# Altium PCB Rx_555_PCB.PcbDoc
Units mil, origin at the board's own origin, x right, y up, seen from the top; angles counter-clockwise.
Board outline 2952.76 x 1968.5 mil, 2 copper layers (Top Layer, Bottom Layer); 74 components, 29 nets, 163 pads, 0 vias.
Unrouted connection lines stored in the file: 133.
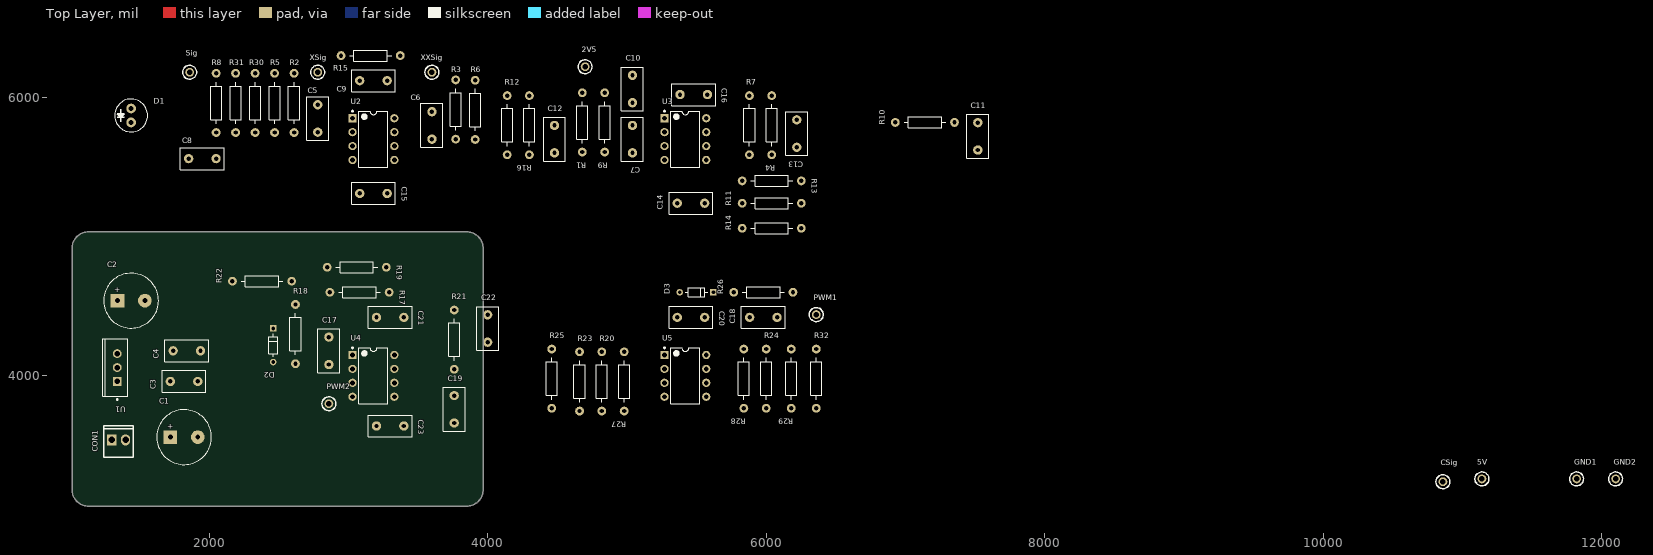
[diagram p0: Top Layer view]
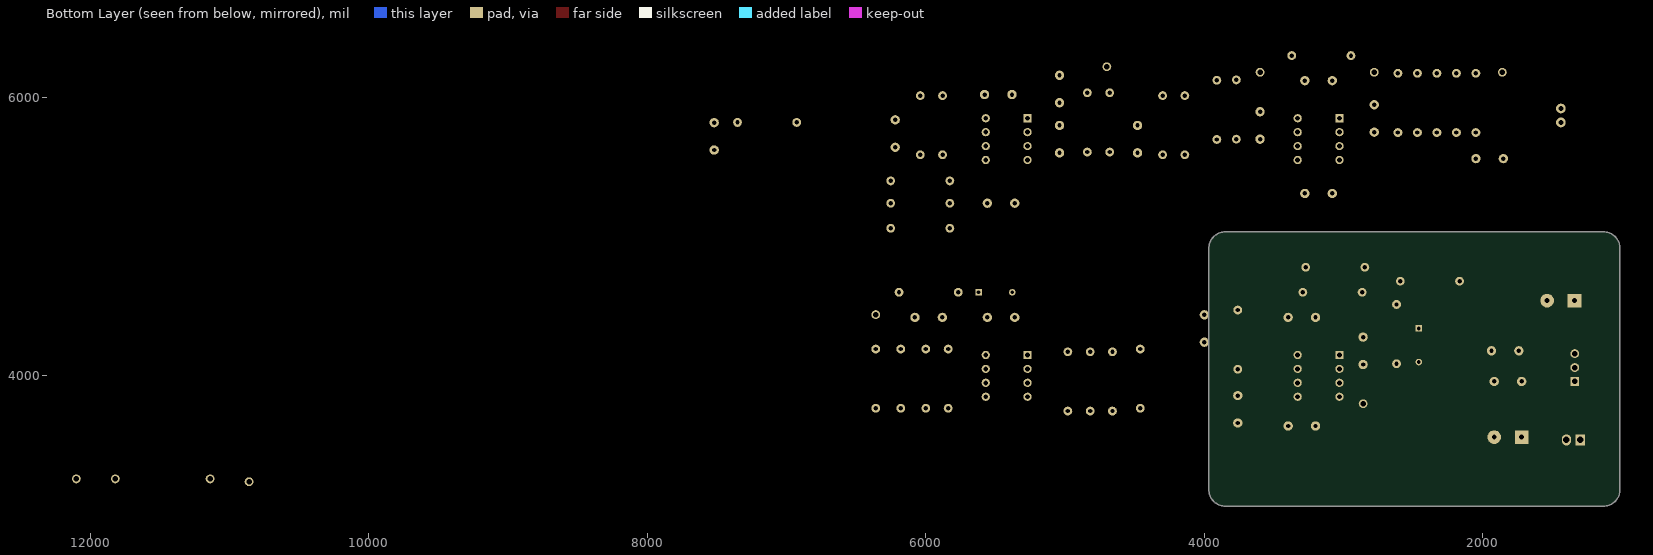
[diagram p1: Bottom Layer view, seen from below]

## Layer stack, top to bottom
Top Solder: solder mask 0.4, Solder Resist, Dk 3.5
Top Layer: signal copper 1.4
Dielectric 1: dielectric 12.6, FR-4, Dk 4.8
Bottom Layer: signal copper 1.4
Bottom Solder: solder mask 0.4, Solder Resist, Dk 3.5

## Board outline
1015.35,3183.11 1015.35,4915.39 cw(c1133.46,4915.39) 1133.46,5033.5 3850,5033.5 cw(c3850,4915.39) 3968.11,4915.39 3968.11,3183.11 cw(c3850,3183.11) 3850,3065 1133.46,3065 cw(c1133.46,3183.11)

## Design rules (kind name [scope] priority, off if disabled: settings)
BoardOutlineClearance [All] p1: gap=11.81 ignorepadtopadclearanceinfootprint=FALSE except(15.75: Arc-SplitBarrior Arc-SplitContinuation Track-SplitBarrior Track-SplitContinuation SMDPad-SplitBarrior SMDPad-SplitContinuation THPad-SplitBarrior THPad-SplitContinuation Via-SplitBarrior Via-SplitContinuation Fill-SplitBarrior Fill-SplitContinuation Poly-SplitBarrior Poly-SplitContinuation Region-SplitBarrior Region-SplitContinuation Text-SplitBarrior Text-SplitContinuation)
Clearance [All] p1: gap=10 ignorepadtopadclearanceinfootprint=TRUE
Height [All] p1: minheight=0 maxheight=1968.5 prefheight=500
HoleSize [All] p1: absolutevalues=TRUE maxlimit=472.44 minlimit=9.84 maxpercent=80.000 minpercent=20.000
MinimumAnnularRing [All] p1: minimumring=5.12
MinimumSolderMaskSliver [All] p1: minsoldermaskwidth=3.94
PolygonConnect PolygonConnect_1 [All] p1: thpad.connectstyle=Relief thpad.reliefconductorwidth=20 thpad.reliefentries=4 thpad.polygonreliefangle="90 Angle" thpad.airgapwidth=10 smdpad.connectstyle=Relief smdpad.reliefconductorwidth=20 smdpad.reliefentries=4 smdpad.polygonreliefangle="90 Angle" smdpad.airgapwidth=10 via.connectstyle=Direct via.reliefconductorwidth=20 via.reliefentries=4 via.polygonreliefangle="90 Angle" via.airgapwidth=10
RoutingCorners [All] p1: cornerstyle=Round minsetback=100 maxsetback=100
RoutingVias [All] p1: holewidth=15.75 width=25.59 viastyle="Through Hole" minholewidth=9.84 minwidth=15.75 maxholewidth=39.37 maxwidth=78.74
SilkToSilkClearance [All] p1: silktosilkclearance=3.94
SilkToSolderMaskClearance [IsPad] p1: minsilkscreentomaskgap=3.94 clearancetoexposedcopper=TRUE
SolderMaskExpansion [All] p1: expansion=4 istentingtop=FALSE
SupplyNets "Schematic Supply Nets" [InNet('Vof')] p1: voltage=0.000
SupplyNets "Schematic Supply Nets_20" [InNet('XXSig')] p2: voltage=0.000
SupplyNets "Schematic Supply Nets_19" [InNet('2V5')] p3: voltage=0.000
SupplyNets "Schematic Supply Nets_18" [InNet('PWM_555')] p4: voltage=0.000
SupplyNets "Schematic Supply Nets_17" [InNet('Sig')] p5: voltage=0.000
SupplyNets "Schematic Supply Nets_16" [InNet('XSig')] p6: voltage=0.000
SupplyNets "Schematic Supply Nets_15" [InNet('CSig')] p7: voltage=0.000
SupplyNets "Schematic Supply Nets_14" [InNet('PWM_Op')] p8: voltage=0.000
SupplyNets "Schematic Supply Nets_13" [InNet('Vfilt')] p9: voltage=0.000
SupplyNets "Schematic Supply Nets_9" [InNet('GND')] p10: voltage=0.000
SupplyNets "Schematic Supply Nets_8" [InNet('VCC')] p11: voltage=0.000
SupplyNets "Schematic Supply Nets_6" [InNet('5V')] p12: voltage=0.000
SupplyNets "Schematic Supply Nets_3" [InNet('CNT')] p13: voltage=0.000
SupplyNets "Schematic Supply Nets_1" [InNet('Vrc')] p14: voltage=0.000
Width [All] p1: maxlimit=400 minlimit=5 preferedwidth=20
24 further rules are at their usual default settings.

## Components (designator, comment, footprint, x,y, rotation, side; value= is the part's Value field where it differs from the comment)
2V5 "TP TH" TP_TH_2.5mm 4700,6220 r0 top
5V "TP TH" TP_TH_2.5mm 11140,3260 r0 top
C1 "ECAP" CR05 1820,3560 r0 top
C2 "ECAP" CR05 1440,4540 r0 top
C3 "CCAP_TH_5P0" CCAP_5P0 1820,3960 r180 top
C4 "CCAP_TH_5P0" CCAP_5P0 1840,4180 r180 top
C5 "CCAP_TH_5P0" CCAP_5P0 2780,5848.43 r270 top
C6 "CCAP_TH_5P0" CCAP_5P0 3600,5798.43 r270 top
C7 "CCAP_TH_5P0" CCAP_5P0 5040,5700 r270 top
C8 "CCAP_TH_5P0" CCAP_5P0 1951.57,5560 r180 top
C9 "CCAP_TH_5P0" CCAP_5P0 3180,6120 r180 top
C10 "CCAP_TH_5P0" CCAP_5P0 5040,6060 r90 top
C11 "CCAP_TH_5P0" CCAP_5P0 7520,5720 r90 top
C12 "CCAP_TH_5P0" CCAP_5P0 4480,5700 r90 top
C13 "CCAP_TH_5P0" CCAP_5P0 6220,5740 r270 top
C14 "CCAP_TH_5P0" CCAP_5P0 5460,5240 r180 top
C15 "CCAP_TH_5P0" CCAP_5P0 3180,5310 r0 top
C16 "CCAP_TH_5P0" CCAP_5P0 5480,6020 r0 top
C17 "CCAP_TH_5P0" CCAP_5P0 2860,4180 r90 top
C18 "CCAP_TH_5P0" CCAP_5P0 5980,4420 r180 top
C19 "CCAP_TH_5P0" CCAP_5P0 3760,3760 r90 top
C20 "CCAP_TH_5P0" CCAP_5P0 5460,4420 r0 top
C21 "CCAP_TH_5P0" CCAP_5P0 3300,4420 r0 top
C22 "CCAP_TH_5P0" CCAP_5P0 4000,4340 r90 top
C23 "CCAP_TH_5P0" CCAP_5P0 3300,3640 r0 top
CON1 "HDR2X1" HDR2X1_2P54 1300,3540 r90 top
CSig "TP TH" TP_TH_2.5mm 10860,3240 r0 top
D1 "PhotoD_TH" TH_LED 1440,5870 r270 top
D2 "BAT85,113" FP-SOD68-MFG 2460,4220 r270 top
D3 "BAT85,113" FP-SOD68-MFG 5500,4600 r180 top
GND1 "TP TH" TP_TH_2.5mm 11820,3260 r0 top
GND2 "TP TH" TP_TH_2.5mm 12100,3260 r90 top
PWM1 "TP TH" TP_TH_2.5mm 6360,4440 r0 top
PWM2 "TP TH" TP_TH_2.5mm 2860,3800 r90 top
R1 "RESAX4" RAX4 4680,5820 r270 top
R2 "RESAX4" RAX4 2610,5960 r270 top
R3 "RESAX4" RAX4 3770,5912.6 r270 top
R4 "RESAX4" RAX4 6040,5800 r270 top
R5 "RESAX4" RAX4 2470,5960 r90 top
R6 "RESAX4" RAX4 3910,5910 r90 top
R7 "RESAX4" RAX4 5880,5800 r90 top
R8 "RESAX4" RAX4 2050,5960 r90 top
R9 "RESAX4" RAX4 4840,5820 r270 top
R10 "RESAX4" RAX4 7140,5820 r180 top
R11 "RESAX4" RAX4 6040,5240 r180 top
R12 "RESAX4" RAX4 4140,5800 r90 top
R13 "RESAX4" RAX4 6040,5400 r0 top
R14 "RESAX4" RAX4 6040,5060 r180 top
R15 "RESAX4" RAX4 3160,6300 r0 top
R16 "RESAX4" RAX4 4300,5800 r270 top
R17 "RESAX4" RAX4 3080,4600 r0 top
R18 "RESAX4" RAX4 2620,4300 r90 top
R19 "RESAX4" RAX4 3060,4780 r0 top
R20 "RESAX4" RAX4 4820,3960 r90 top
R21 "RESAX4" RAX4 3760,4260 r90 top
R22 "RESAX4" RAX4 2380,4680 r180 top
R23 "RESAX4" RAX4 4660,3960 r90 top
R24 "RESAX4" RAX4 6000,3980 r90 top
R25 "RESAX4" RAX4 4460,3980 r90 top
R26 "RESAX4" RAX4 5980,4600 r180 top
R27 "RESAX4" RAX4 4980,3960 r270 top
R28 "RESAX4" RAX4 5840,3980 r270 top
R29 "RESAX4" RAX4 6180,3980 r270 top
R30 "RESAX4" RAX4 2330,5960 r270 top
R31 "RESAX4" RAX4 2190,5960 r90 top
R32 "RESAX4" RAX4 6360,3980 r90 top
Sig "TP TH" TP_TH_2.5mm 1860,6180 r0 top
U1 "REG78M05" TO220_Reg 1340,4060 r180 top
U2 "TLC082IP" P0008A 3180,5700 r0 top locked
U3 "TLC082IP" P0008A 5420,5700 r0 top locked
U4 "NE555P" P0008A 3180,4000 r0 top locked
U5 "TLC082IP" P0008A 5420,4000 r0 top locked
XSig "TP TH" TP_TH_2.5mm 2780,6180 r0 top
XXSig "TP TH" TP_TH_2.5mm 3600,6180 r90 top

## Footprints (in the part's own frame and the unit in brackets; to place one, negate y for a bottom-side part, rotate by r counter-clockwise, add the part's x,y. Pads: shape width x height; smd on the part's side, far side on the other; paste and mask are expansions set on the pad)
CCAP_5P0 [mm]
  round 1.7 hole 0.8: 1(-2.5,0) 2(2.5,0)
  silkscreen extent -4,-2 4,2, body extent -3.25,-1.5 3.25,1.5, height 6.5
CR05 [mm]
  rect 2.5x2.5 hole 0.9: 1(-2.5,0)
  round 2.5 hole 0.9: 2(2.5,0)
  silkscreen extent -5,-5 5,5, body extent -4,-3.99 4,3.99, height 11.5
FP-SOD68-MFG [mm]
  rect 1.2x1.2 hole 0.7 paste-2539.97 mask+0: 1(-3.07,0)
  round 1.2 hole 0.7 paste-2539.97 mask+0: 2(3.07,0)
  silkscreen extent -2.07,-0.8 2.07,0.8, body extent -3.77,-0.9 3.77,0.9, height 0.25
HDR2X1_2P54 [mm] "Polarised Header 2 way"
  rect 2x1.7 hole 1.2: 1(0,0)
  oval 2x1.7 hole 1.2: 2(0,-2.54)
  silkscreen extent -3.16,-3.96 2.54,1.42, body extent -3.3,-3.64 3.18,1.44, height 10.09
P0008A [mm] "DIP, 8-Leads, Body 10.15x6.6mm, Pitch 2.54mm"
  rect 1.5x1.5 hole 0.9: 1(-3.81,3.81)
  round 1.5 hole 0.9: 2(-3.81,1.27) 3(-3.81,-1.27) 4(-3.81,-3.81) 5(3.81,-3.81) 6(3.81,-1.27) 7(3.81,1.27) 8(3.81,3.81)
  silkscreen extent -3.93,-5.1 2.65,5.23, body extent -3.95,-5.07 3.95,5.07, height 5.08
RAX4 [mm]
  round 1.6 hole 0.8: 1(-5.4,0) 2(5.4,0)
  silkscreen extent -3.81,-1.02 3.81,1.02, body extent -5.7,-1.3 5.7,1.3, height 2.7
TH_LED [mil]
  round 70 hole 35.43: 1(50,0) 2(-50,0)
  silkscreen extent -118,-118 118,118, body extent -98,-98 98,98, height 413
TO220_Reg [mm] "FM, 3-Leads, Body 10.03x8.98mm, Pitch 2.54mm"
  rect 1.6x1.6 hole 1: 1(0,2.54)
  round 1.6 hole 1: 3(0,-2.54) 4(0,0)
  silkscreen extent -1.93,-5.2 2.67,5.97, body extent -1.93,-5.2 2.67,5.2, height 20.75
TP_TH_2.5mm [mm] "Keystone through hole TP"
  round 1.6 hole 1: 1(0,0)
  silkscreen extent -1.27,-1.27 1.27,1.27, body extent -1.59,-1.59 1.59,1.59, height 5.59

## Part data
2V5 5V CSig GND1 GND2 PWM1 PWM2 Sig XSig XXSig: library part CMP-046-000000-3, "Testpoint through hole / Keystone compact / 5000 - Red / 5001 - Black / 5002 - White / 5003 - Orange / 5004 - Yellow", Design Item ID="TP TH", Source="UoAPE_Connectors and Mechanical.SchLib"
C1 C2: library part CMP-003-000000-2, Design Item ID=ECAP, Source=CommonSymbols_V1.SchLib
C3 C4 C5 C6 C7 C8 C9 C10 C11 C12 C13 C14 C15 C16 C17 C18 C19 C20 C21 C22 C23: library part CMP-001-00023-1, "TH ceramic cap with 5mm pitch", Design Item ID=CCAP_5P0
CON1: library part CMP-004-000000-7, "Header 2X1", Design Item ID=HDR2X1, Source=CommonSymbols_V1.SchLib
D1: library part CMP-007-00003-1, "Photo diode"
D2 D3: library part CMP-00011-1, "Rectifier Diode, Schottky, 1 Phase, 1 Element, 0.2A, 30V V(RRM), Silicon, DO-34", Case Connection=Isolated, Forward Voltage=800mV, Max Operating Temperature=125°C, Max Output current=200mA, Max Power Dissipation=200mW, Max Reverse Current=2uA, Min Operating Temperature=-55°C, Non-rep Pk Forward Current-Max=600mA, Package Body Material=Glass, Package Shape=Round, Package Style="LONG FORMMeter", Peak Reflow Temperature (Cel)=260°C, Rep Pk Reverse Voltage-Max=30V, Time @ Peak Reflow Temperature-Max (s)=40s, Diode Element Material=SILICON, Diode Type=RECTIFIER, JEDEC-95 Code=DO-34, JESD-30 Code=O-LALF-W2, JESD-609 Code=e3, Moisture Sensitivity Level=1, Number of Elements=1, Pins=2, Qualification Status="Not Qualified", Reach SVHC Compliant=Yes, Reverse Recovery Time-Max=0.004us, RoHS Compliant=Yes, Surface Mount=No, Technology=SCHOTTKY, Terminal Finish=Tin, Terminal Form=Wire, Terminal Position=AXIAL
R1 R2 R3 R4 R5 R6 R7 R8 R9 R10 R11 R12 R13 R14 R15 R16 R17 R18 R19 R20 R21 R22 R23 R24 R25 R26 R27 R28 R29 R30 R31 R32: library part CMP-010-000001-2, "Axial Resistor", Design Item ID=RESAX4, Source=CommonSymbols_V1.SchLib
U1: library part CMP-011-000018-2, "78M Series Linear Regulators", Design Item ID=REG78MXX, Source=CommonSymbols_V1.SchLib
U2 U3 U5: library part CMP-014-00006-1, "Operational Amplifier, 2 Func, 3000uV Offset-Max, BIMOS, PDIP8", Average Bias Current-Max (IIB)=700pA, Bias Current-Max (IIB) @25C=50pA, Case/Package=DIP, Frequency Compensation=YES, Input Offset Voltage-Max=3mV, Max Operating Temperature=125°C, Max Supply Current=7mA, Micropower=No, Min Operating Temperature=-40°C, Nominal Supply Voltage=5V, Package Body Material=Plastic, Package Equivalence Code=DIP8,.3, Package Shape=Rectangular, Package Style=IN-LINEMeter, Power=100mW, Power Supplies=+-2.25/+-8/4.5/16V, Supply Voltage Limit-Max=17V, Temperature Grade=AUTOMOTIVE, Voltage Gain-Min=100000, Amplifier Type="OPERATIONAL AMPLIFIER", Architecture=VOLTAGE-FEEDBACK, Channels=2, Common-mode Reject Ratio-Nom=110dB, Height - Seated (Max)=5.08mm, JESD-30 Code=R-PDIP-T8, JESD-609 Code=e4, Length=9.81mm, Low-Bias=Yes, Low-Offset=No, Packaging=Rail/Tube, Pins=8, Programmable Power=No, Qualification Status="Not Qualified", Reach SVHC Compliant=Yes, RoHS Compliant=Yes, Slew Rate=16V/µs, Slew Rate-Min=9.5V/µs, Surface Mount=No, Technology=BIMOS, Terminal Finish=Nickel, Terminal Form="Through Hole", Terminal Pitch=2.54mm, Terminal Position=DUAL, Unity Gain BW-Nom=10MHz, Wideband=No, Width=7.62mm
U4: library part CMP-00023-00000-1, "1 Func, BIPolar, PDIP8", Case/Package=DIP, Max Operating Temperature=70°C, Max Supply Voltage=16V, Min Operating Temperature=0°C, Min Supply Voltage=4.5V, Nominal Supply Voltage=5V, Package Body Material=Plastic, Package Equivalence Code=DIP8,.3, Package Shape=Rectangular, Package Style=IN-LINEMeter, Power Supplies=5/15V, Temperature Grade=COMMERCIAL, Channels=1, Height - Seated (Max)=5.08mm, JESD-30 Code=R-PDIP-T8, JESD-609 Code=e3, Length=9.81mm, Pins=8, Qualification Status="Not Qualified", Reach SVHC Compliant=Yes, RoHS Compliant=Yes, Surface Mount=No, Technology=BIPOLAR, Terminal Finish=Tin, Terminal Form="Through Hole", Terminal Pitch=2.54mm, Terminal Position=DUAL, Throw Configuration="PULSE; RECTANGULAR", Width=7.62mm

## Nets (pads, with @x,y where several pads share a name; then routed paths per layer and width w, separated by ;. In a path a pad name is that pad's centre, name@x,y a point inside that pad or via, vN(x,y) a via of type N, cw(c..) or ccw(c..) an arc to the next point about the centre after c; other vN are vias at no path point)
2V5: 2V5.1 C10.1 R1.1 R6.2 R9.1 R15.1 R31.2 U5.2 U5.6
5V: 5V.1 C2.1 C4.2 C8.2 C15.2 C16.2 C20.2 C21.2 C22.2 D1.1 D2.1 R12.2 R17.2 R18.2 R20.1 R21.2 R32.1 U1.3 U2.8 U3.8 U4.4 U4.8 U5.8
CNT: C23.2 U4.5
CSig: CSig.1 D3.2 R20.2 R22.2 R27.1 U5.1
GND: C1.2 C2.2 C3.1 C4.1 C8.1 C10.2 C11.1 C12.2 C14.2 C15.1 C16.1 C19.1 C20.1 C21.1 C22.1 C23.1 CON1.1 GND1.1 GND2.1 R5.2 R7.2 R8.1 R16.1 R25.2 R29.2 U1.4 U2.4 U3.4 U4.1 U5.4
NetC5_2: C5.2 R2.2 R5.1 R30.1 U2.2
NetC6_2: C6.2 R3.2 R6.1 U2.6
NetC7_1: C7.1 R9.2 U3.1
NetC7_2: C7.2 R1.2 U3.2
NetC9_1: C9.1 R15.2 U2.5
NetC12_1: C12.1 R12.1 R16.2 U3.3
NetC13_2: C13.2 R11.1 R13.2 R14.1
NetC14_1: C14.1 R13.1 U3.5
NetC17_1: C17.1 D2.2 R18.1 U4.2
NetC17_2: C17.2 R17.1 R19.1 R22.1
NetC18_1: C18.1 R24.2 R26.1 R29.1
NetC18_2: C18.2 D3.1 R26.2
NetR4_2: R4.2 R7.1 U3.6
NetR23_1: R23.1 R25.1 R27.2 U5.3
NetR24_1: R24.1 R28.2 U5.5
PWM_555: PWM2.1 R11.2 U4.3
PWM_Op: PWM1.1 R14.2 R28.1 R32.2 U5.7
Sig: D1.2 R8.2 R30.2 R31.1 Sig.1 U2.3
VCC: C1.1 C3.2 CON1.2 U1.1
Vfilt: C11.2 R10.1
Vof: C13.1 R4.1 R10.2 U3.7
Vrc: C19.2 R21.1 U4.6 U4.7
XSig: C5.1 C9.2 R2.1 U2.1 XSig.1
XXSig: C6.1 R3.1 R19.2 R23.2 U2.7 XXSig.1

## Text inside footprints (layer, text, board x,y; h text height)
C1: Top Overlay "+" at 1700,3620 h39.37
C2: Top Overlay "+" at 1320,4600 h39.37